# Altium PCB BMS-TEMPSTRIP-P00.PcbDoc
Units mm, origin at the board's own origin, x right, y up, seen from the top; angles counter-clockwise.
Board outline 10 x 286.53 mm, 2 copper layers (Top Layer, Bottom Layer); 25 components, 9 nets, 61 pads, 0 vias.
Unrouted connection lines stored in the file: 52.
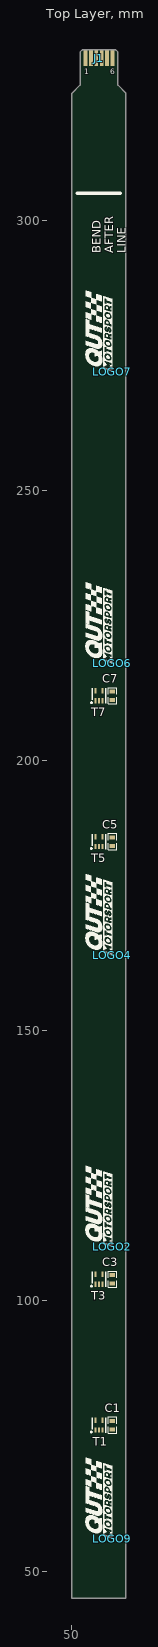
[diagram p0: Top Layer view]
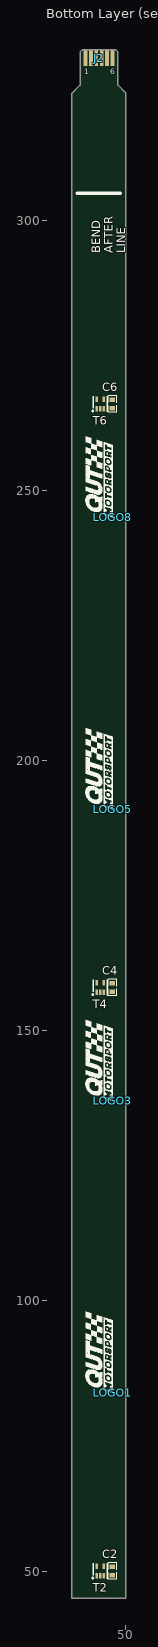
[diagram p1: Bottom Layer view, seen from below]

## Layer stack, top to bottom
Top Solder: solder mask 0.0102, Solder Resist, Dk 3.5
Top Layer: signal copper 0.0356
Dielectric 1: dielectric 0.32, FR-4, Dk 4.8
Bottom Layer: signal copper 0.0356
Bottom Solder: solder mask 0.0102, Solder Resist, Dk 3.5

## Board outline
50,45 50,323.528 51.5,325.028 51.5,331.128 51.9,331.528 58.1,331.528 58.5,331.128 58.5,325.028 60,323.528 60,45

## Design rules (kind name [scope] priority, off if disabled: settings)
Clearance [All] p1: gap=0.254 ignorepadtopadclearanceinfootprint=FALSE except(0: Arc-Hole Track-Hole SMDPad-Hole THPad-Hole Via-Hole Fill-Hole Poly-Hole Region-Hole Text-Hole)
PolygonConnect [All] p1: connectstyle=Relief reliefconductorwidth=0.254 reliefentries=4 polygonreliefangle="90 Angle" airgapwidth=0.254
RoutingVias [All] p1: holewidth=0.711 width=1.27 viastyle="Through Hole" minholewidth=0.711 minwidth=1.27 maxholewidth=0.711 maxwidth=1.27
SolderMaskExpansion [All] p1: expansion=0.102 istentingtop=FALSE
Width [All] p1: maxlimit=0.254 minlimit=0.254 preferedwidth=0.254
30 further rules are at their usual default settings.

## Components (designator, comment, footprint, x,y, rotation, side; value= is the part's Value field where it differs from the comment)
C1 "100nF" Cap_Ceramic_0603 57.5,77 r90 top
C2 "100nF" Cap_Ceramic_0603 52.5,50 r90 bottom
C3 "100nF" Cap_Ceramic_0603 57.5,104 r90 top
C4 "100nF" Cap_Ceramic_0603 52.5,158 r90 bottom
C5 "100nF" Cap_Ceramic_0603 57.5,185 r90 top
C6 "100nF" Cap_Ceramic_0603 52.5,266 r90 bottom
C7 "100nF" Cap_Ceramic_0603 57.5,212 r90 top
J1 "0526100672 FFC Insert End" "0526100672 FFC INSERT END" 55,330.028 r0 top
J2 "0526100672 FFC Insert End" "0526100672 FFC INSERT END" 55,330.028 r180 bottom
LOGO1 "15mm Wide QUTMS Logo" "QUTMS LOGO 15MM" 52.47,83 r90 bottom
LOGO2 "15mm Wide QUTMS Logo" "QUTMS LOGO 15MM" 57.5,110 r90 top
LOGO3 "15mm Wide QUTMS Logo" "QUTMS LOGO 15MM" 52.47,137 r90 bottom
LOGO4 "15mm Wide QUTMS Logo" "QUTMS LOGO 15MM" 57.5,164 r90 top
LOGO5 "15mm Wide QUTMS Logo" "QUTMS LOGO 15MM" 52.47,191 r90 bottom
LOGO6 "15mm Wide QUTMS Logo" "QUTMS LOGO 15MM" 57.5,218 r90 top
LOGO7 "15mm Wide QUTMS Logo" "QUTMS LOGO 15MM" 57.5,272 r90 top
LOGO8 "15mm Wide QUTMS Logo" "QUTMS LOGO 15MM" 52.47,245 r90 bottom
LOGO9 "15mm Wide QUTMS Logo" "QUTMS LOGO 15MM" 57.5,56 r90 top
T1 "TMP05AKSZ" "SC-70 (KS-5)" 55,77 r0 top
T2 "TMP05AKSZ" "SC-70 (KS-5)" 54.746,50 r180 bottom
T3 "TMP05AKSZ" "SC-70 (KS-5)" 55,104 r0 top
T4 "TMP05AKSZ" "SC-70 (KS-5)" 54.746,158 r180 bottom
T5 "TMP05AKSZ" "SC-70 (KS-5)" 55,185 r0 top
T6 "TMP05AKSZ" "SC-70 (KS-5)" 54.746,266 r180 bottom
T7 "TMP05AKSZ" "SC-70 (KS-5)" 55,212 r0 top

## Footprints (in the part's own frame and the unit in brackets; to place one, negate y for a bottom-side part, rotate by r counter-clockwise, add the part's x,y. Pads: shape width x height; smd on the part's side, far side on the other; paste and mask are expansions set on the pad)
"0526100672 FFC INSERT END" [mm]
  rect 0.7x3 smd: 1(-2.5,0) 2(-1.5,0) 3(-0.5,0) 4(0.5,0) 5(1.5,0) 6(2.5,0)
Cap_Ceramic_0603 [mil]
  rect 30x40 smd: 1(-31.24,0) 2(31.24,0)
  silkscreen extent -60,-30 60,30, body extent -31,-16 32,16, height 33
"QUTMS LOGO 15MM" [mm]
  silkscreen extent 0,0 14.99,5.03
"SC-70 (KS-5)" [mm]
  rect 0.45x1 smd: 1(-0.65,-0.9) 2(0,-0.9) 3(0.65,-0.9) 4(0.65,0.9) 5(-0.65,0.9)
  silkscreen extent -1.52,-1.4 1.27,1.4, body extent -0.98,-1.05 1.02,1.05, height 0.94

## Part data
C1 C2 C3 C4 C5 C6 C7: library part "100nF 50V 5% X7R 0603", "Capacitor, Ceramic, SMD, 100nF, 50V, 5%, X7R, 0603"
LOGO1 LOGO2 LOGO3 LOGO4 LOGO5 LOGO6 LOGO7 LOGO8 LOGO9: library part "QUTMS Logo 15mm"
T1 T2 T3 T4 T5 T6 T7: "Temperature Sensor, SMD, 3.3V, 2%, SOT-353"

## Nets (pads, with @x,y where several pads share a name; then routed paths per layer and width w, separated by ;. In a path a pad name is that pad's centre, name@x,y a point inside that pad or via, vN(x,y) a via of type N, cw(c..) or ccw(c..) an arc to the next point about the centre after c; other vN are vias at no path point)
3V3: C1.1 C2.1 C3.1 C4.1 C5.1 C6.1 C7.1 J1.1 J2.1 T1.3 T1.5 T2.3 T2.5 T3.3 T3.5 T4.3 T4.5 T5.3 T5.5 T6.3 T6.5 T7.3 T7.5
"CHAIN A 1": T1.1 T3.2
"CHAIN A 2": T3.1 T5.2
"CHAIN A 3": T5.1 T7.2
"CHAIN B 1": T2.1 T4.2
"CHAIN B 2": T4.1 T6.2
GND: C1.2 C2.2 C3.2 C4.2 C5.2 C6.2 C7.2 J1.3 J1.5 J1.6 J2.3 J2.5 J2.6 T1.4 T2.4 T3.4 T4.4 T5.4 T6.4 T7.4
"PWM OUT": J1.4 J2.4 T6.1 T7.1
SOC: J1.2 J2.2 T1.2 T2.2

## Silkscreen, mask and mechanical layers (free items; w line width, h text height)
Top Overlay:
  lines w0.6: 51,305 59,305
  text "BEND / AFTER / LINE" at 59.944,293.88 h1.52 r90
Bottom Overlay:
  lines w0.6: 51,305 59,305
  text "BEND / AFTER / LINE" at 50.165,293.88 h1.52 r270
Mechanical 1:
  lines w0.254: 51.5,325.028 50,323.528 50,45 60,45 60,323.528 58.5,325.028 ; 65,305 82.369,305
  text "Bend before this point" at 66.04,302.641 h1.52

## Text inside footprints (layer, text, board x,y; h text height)
J1: Top Overlay "6" at 57.041,327.056 h1.02; Top Overlay "1" at 52.282,327.056 h1.02
J2: Bottom Overlay "6" at 52.959,327.056 h1.02; Bottom Overlay "1" at 57.718,327.056 h1.02